# EAGLE board RCSfullschematic2 (EAGLE 7.5.0)

Size 43.17 x 80 mm. Coordinates in mm from the lower left corner, seen from the top.
Outline: 0,0 43.17,0 43.17,80 0,80 0,0
Copper layers (1*16): Top 0.0356mm / dielectric 1.5011mm / Bottom 0.0356mm
Design rules "LaenPCBOrder": minimum track width 6mil, minimum drill 13mil, track to track 6mil, track to pad 6mil, pad to pad 6mil, via to via 6mil, smd to smd 6mil, copper to edge 15mil, drill to drill 6mil, minimum pad ring 7mil, minimum via ring 7mil, stop-mask expansion 3mil, vias tented up to drill 0mil, thermal gap 10mil
Net classes: 1 Motor: width 0.699 mm
Holes 3.26 mm at 3.17,77.47 38.42,77.15 38.1,2.54 3.17,2.54

## Footprints (pad centres in the part's own frame; a part is rotated, then mirrored left to right if it is on the bottom)
1206 = smd 1.6 x 1.8: 1 -1.4,0; 2 1.4,0
C1206 = smd 1.6 x 1.8: 1 -1.4,0; 2 1.4,0
EIA3216 = smd 1.4 x 1.6: + 1.4,0; - -1.4,0
SOD-323@2 = smd 0.63 x 0.83: A 1.15,0; C -1.15,0
SOD-323 = smd 0.63 x 0.83: A 1.15,0; C -1.15,0
CHIPLED_1206 = smd 1.5 x 1.5: A 0,-1.75; C 0,1.75
PTC-1206 = smd 1 x 1.8: 1 -1.4,0; 2 1.4,0
SSOP28 = smd 0.4 x 1.5: 1 -4.225,-3.625; 2 -3.575,-3.625; 3 -2.925,-3.625; 4 -2.275,-3.625; 5 -1.625,-3.625; 6 -0.975,-3.625; 7 -0.325,-3.625; 8 0.325,-3.625; 9 0.975,-3.625; 10 1.625,-3.625; 11 2.275,-3.625; 12 2.925,-3.625; 13 3.575,-3.625; 14 4.225,-3.625; 15 4.225,3.625; 16 3.575,3.625; 17 2.925,3.625; 18 2.275,3.625; 19 1.625,3.625; 20 0.975,3.625; 21 0.325,3.625; 22 -0.325,3.625; 23 -0.975,3.625; 24 -1.625,3.625; 25 -2.275,3.625; 26 -2.925,3.625; 27 -3.575,3.625; 28 -4.225,3.625
317TS = drill 1.016 long: 1 -2.54,-2.54; 2 0,-2.54; 3 2.54,-2.54
MA04-1 = drill 1.016 long: 1 -3.81,0; 2 -1.27,0; 3 1.27,0; 4 3.81,0
1X06_LOCK = drill 1.016 pad 1.88: 1 0,0; 2 2.54,-0.254; 3 5.08,0; 4 7.62,-0.254; 5 10.16,0; 6 12.7,-0.254
USB-MICROB = smd 0.35 x 1.4: D+ 0,2.65; D- -0.65,2.65; GND 1.3,2.65; ID 0.65,2.65; VBUS -1.3,2.65 | smd 1.8 x 1.9: MT1 -4,0; MT2 4,0 | smd 1.9 x 1.9: P$1 -1.27,0; P$2 1.27,0
1X02 = drill 1.016 pad 1.88: 1 0,0; 2 2.54,0
SOT223 = smd 1.219 x 2.235: 1 -2.311,-3.099; 2 0,-3.099; 3 2.311,-3.099 | smd 3.6 x 2.2: 4 0,3.099
1X03 = drill 1.016 pad 1.88: 1 0,0; 2 2.54,0; 3 5.08,0
DIL06 = drill 0.813 offset: 1 -2.54,-3.81; 2 0,-3.81; 3 2.54,-3.81; 4 2.54,3.81; 5 0,3.81; 6 -2.54,3.81
HC49/S = drill 0.813: 1 -2.413,0; 2 2.413,0
R1206 = smd 1.6 x 1.803: 1 -1.422,0; 2 1.422,0
M1206 = smd 1.6 x 2: 1 -1.4,0; 2 1.4,0
DIL08 = drill 0.813 long: 1 -3.81,-3.81; 2 -1.27,-3.81; 3 1.27,-3.81; 4 3.81,-3.81; 5 3.81,3.81; 6 1.27,3.81; 7 -1.27,3.81; 8 -3.81,3.81
PUSHBUTTON_SMD_SJ = smd 2 x 2: P$1 3,0; P$2 -3,0
EDG-01 = drill 0.813 long: 1 0,-3.81; 2 0,3.81
SOT23-3 = smd 0.8 x 0.9: 1 -0.95,-1; 2 0.95,-1; 3 0,1.1
LGA-8 = smd 1.2 x 0.5: 1 -1.2,1.875; 2 -1.2,0.625; 3 -1.2,-0.625; 4 -1.2,-1.875; 5 1.2,-1.875; 6 1.2,-0.625; 7 1.2,0.625; 8 1.2,1.875
LEAD-QFN24 = smd 0.6 x 0.2: 1 -1.6,1; 2 -1.6,0.6; 3 -1.6,0.2; 4 -1.6,-0.2; 5 -1.6,-0.6; 6 -1.6,-1; 13 1.6,-1; 14 1.6,-0.6; 15 1.6,-0.2; 16 1.6,0.2; 17 1.6,0.6; 18 1.6,1 | smd 0.2 x 0.6: 7 -1,-1.6; 8 -0.6,-1.6; 9 -0.2,-1.6; 10 0.2,-1.6; 11 0.6,-1.6; 12 1,-1.6; 19 1,1.6; 20 0.6,1.6; 21 0.2,1.6; 22 -0.2,1.6; 23 -0.6,1.6; 24 -1,1.6 | smd 1.7 x 1.54: 25 0,0
TQFP32-08 = smd 1.27 x 0.559: 1 -4.293,2.8; 2 -4.293,2; 3 -4.293,1.2; 4 -4.293,0.4; 5 -4.293,-0.4; 6 -4.293,-1.2; 7 -4.293,-2; 8 -4.293,-2.8; 17 4.293,-2.8; 18 4.293,-2; 19 4.293,-1.2; 20 4.293,-0.4; 21 4.293,0.4; 22 4.293,1.2; 23 4.293,2; 24 4.293,2.8 | smd 0.559 x 1.27: 9 -2.8,-4.293; 10 -2,-4.293; 11 -1.2,-4.293; 12 -0.4,-4.293; 13 0.4,-4.293; 14 1.2,-4.293; 15 2,-4.293; 16 2.8,-4.293; 25 2.8,4.293; 26 2,4.293; 27 1.2,4.293; 28 0.4,4.293; 29 -0.4,4.293; 30 -1.2,4.293; 31 -2,4.293; 32 -2.8,4.293
MSOP10 = smd 0.3 x 1: 1 -1,-2.05; 2 -0.5,-2.05; 3 0,-2.05; 4 0.5,-2.05; 5 1,-2.05; 6 1,2.05; 7 0.5,2.05; 8 0,2.05; 9 -0.5,2.05; 10 -1,2.05

## Placement (x,y rotation side)
C1  .1uF  [1206]  3.49,40.01 180 top
C2  .1uF  [1206]  3.49,36.51 180 top
C3  .1uF  [1206]  15.24,38.73 270 top
C4  0.1uF  [1206]  40.01,32.38 270 top
C5  0.1uF  [1206]  9.53,57.78 0 top
C6  22 pF  [C1206]  16.83,10.48 0 top
C7  22 pF  [C1206]  16.83,15.24 0 top
C8  100 nF  [C1206]  3.49,32.7 180 top
C9  .1 uF  [C1206]  27.3,26.35 180 top
C10  10 uF  [C1206]  3.49,28.89 180 top
C11  0.1 uF  [C1206]  3.49,25.4 180 top
C12  0.1uF  [C1206]  23.5,66.36 0 top
C13  10uF  [EIA3216]  39.05,46.35 270 top
C14  10uF  [EIA3216]  23.5,57.78 0 top
C15  0.1uF  [C1206]  36.51,38.73 90 top
C16  10uF  [EIA3216]  16.51,57.78 0 top
C17  10uF  [EIA3216]  16.51,62.23 0 top
D1  3.3V  [SOD-323@2]  38.73,52.39 0 top
D4  BAT20JFILM  [SOD-323]  31.43,60.33 0 top
ERROR  Red  [CHIPLED_1206]  20.64,20.64 90 top
F1  1.5A  [PTC-1206]  31.75,55.24 180 top
F2  500mA  [PTC-1206]  33.34,26.35 0 top
F3  100mA  [PTC-1206]  16.51,66.36 180 top
F4  1.5A  [PTC-1206]  9.53,61.91 0 top
IC2  FT232RL  [SSOP28]  12.06,25.4 270 top
IC3  [317TS]  18.41,79.69 0 top
J1  [MA04-1]  28.89,2.22 0 top
J6  [1X06_LOCK]  7.3,2.22 0 top
J7  USB-MICROB  [USB-MICROB]  2.54,18.41 270 top
JP1  SENSOR/MCU  [1X02]  3.17,55.56 270 top
JP5  MOTOR  [1X02]  3.17,61.59 270 top
LM117  [SOT223]  32.07,47.31 0 top
MCU  [1X03]  2.22,6.03 90 top
MPWR1  11.1  [1X02]  10.79,77.47 180 top
MPWR2  7.4V  [1X02]  38.73,70.17 90 top
OK1  4N35  [DIL06]  31.43,68.26 0 top
POT  [1X03]  3.17,43.81 90 top
Q2  8 MHz  [HC49/S]  10.48,13.34 90 top
R1  220  [1206]  38.73,23.81 90 top
R2  10k  [1206]  16.51,70.8 180 top
R3  10k  [1206]  40.01,38.73 90 top
R4  1.2k  [1206]  33.34,38.73 270 top
R5  10k  [R1206]  26.35,38.73 270 top
R6  10k  [R1206]  33.02,32.38 90 top
R7  10k  [R1206]  36.51,32.38 90 top
R8  100  [R1206]  22.86,38.73 90 top
R9  100  [R1206]  29.53,32.38 90 top
R10  100  [R1206]  33.66,20.64 180 top
R11  10k  [R1206]  29.84,38.73 270 top
R12  180  [M1206]  23.5,61.91 180 top
R13  110  [M1206]  23.5,70.8 180 top
R14  200  [M1206]  9.53,70.8 0 top
R15  750  [M1206]  9.53,66.36 180 top
R16  100  [R1206]  20.64,26.35 0 top
RX  Yellow  [CHIPLED_1206]  25.72,32.38 0 top
SERVO  SMALL_SERVO  [1X03]  38.1,61.28 270 top
STATE  AT24CP  [DIL08]  10.79,48.26 270 top
STATUS  Green  [CHIPLED_1206]  27.3,20.64 270 top
STORAGE  AT24CP  [DIL08]  22.23,48.26 270 top
SW1  [PUSHBUTTON_SMD_SJ]  36.51,8.89 180 top
SW2  [EDG-01]  30.48,77.47 270 top
SW3  [EDG-01]  3.17,69.22 0 top
T1  MMBT2222A  [SOT23-3]  38.73,65.72 270 top
TX  Yellow  [CHIPLED_1206]  19.05,38.73 0 top
U1  MPL3115A2  [LGA-8]  10.16,37.47 0 top
U2  MPU-9250  [LEAD-QFN24]  20.32,32.38 270 top
U3  ATMEGA328P_TQFP  [TQFP32-08]  25.72,12.06 0 top
U4  ADS1015  [MSOP10]  36.51,16.19 270 top

## Library data of the parts
C1-C3 = SparkFun-Capacitors; PROD_ID: CAP-10057
C4 C5 R1-R4 = SparkFun-Passives
C6-C11 = eagle-ltspice; SPICEMODEL: NONE; SPICEPREFIX: C
C12 C15 R12-R15 = rcl
C13 C14 C16 C17 = SparkFun-Capacitors; PROD_ID: CAP-00811
D1 = SparkFun-DiscreteSemi; PROD_ID: DIO-08199
D4 = SparkFun-DiscreteSemi; PROD_ID: DIO-11623
ERROR R5-R11 R16 RX STATUS SW1 TX = adafruit
F1-F4 = SparkFun-PowerIC; PROD_ID: RES-11150
IC2 = ftdichip; MPN: FT232RL; OC_FARNELL: 1146032; OC_NEWARK: 91K9918
IC3 = v-reg
J1 = con-lstb; OC_FARNELL: unknown; OC_NEWARK: unknown
J6 JP1 JP5 MCU MPWR1 MPWR2 POT = SparkFun-Connectors
J7 = SparkFun-Connectors; PROD_ID: CONN-09505
LM117 = SparkFun-IC-Power; PROD_ID: VREG-08170
OK1 = optocoupler; MF: FAIRCHILD SEMICONDUCTOR; MPN: 4N35; OC_FARNELL: 1328375; OC_NEWARK: 72K9946
Q2 = adafruit; OC_FARNELL: 1667008; OC_NEWARK: unknown
SERVO = SparkFun-Electromechanical
STATE STORAGE = atmel; MPN: AT24C1024BW-SH-B; OC_FARNELL: 1362646; OC_NEWARK: 03P2044
SW2 SW3 = special
T1 = SparkFun-DiscreteSemi; PROD_ID: TRANS-08049
U1 = SparkFun-Sensors; PROD_ID: IC-10869
U2 = invensense copy
U3 = SparkFun-DigitalIC; PROD_ID: IC-09069
U4 = SparkFun-AnalogIC; PROD_ID: IC-12239

## Nets
6V_POWER [Motor]: C4.1 C5.1 D4.C F1.1 R2.2 R3.1 SERVO.2
A4(SDA): J1.2 R7.1 STATE.5 STORAGE.5 U1.7 U2.24 U3.27 U4.9
A5(SCL): J1.1 R6.1 STATE.6 STORAGE.6 U1.8 U2.23 U3.28 U4.10
CS: U2.22
DM: IC2.16 J7.D-
DP: IC2.15 J7.D+
DTR: C9.2 IC2.2
FEEDBACK: MCU.1 POT.2 U3.26 U4.4
GND: C1.2 C2.2 C3.2 C6.1 C7.1 C8.1 C10.2 C11.2 C12.2 C13.- C14.- D1.A IC2.7 IC2.18 IC2.21 IC2.25 IC2.26 J1.4 J6.1 J7.GND J7.MT1 J7.MT2 JP1.2 MCU.3 MPWR2.1 OK1.2 R4.2 R8.1 R9.1 R10.1 R11.2 R12.1 R16.1 STATE.1 STATE.2 STATE.4 STORAGE.1 STORAGE.2 STORAGE.3 STORAGE.4 STORAGE.7 SW1.P$2 U1.3 U2.9 U2.11 U2.18 U2.20 U3.3 U3.5 U3.21 U4.3
GND1 [Motor]: C4.2 C5.2 C15.2 C16.- C17.- D4.A JP5.2 MPWR1.1 OK1.4 R15.1 SERVO.3 T1.2
INT: U2.12 U3.32
INT1: U1.6
INT2: U1.5
LOGIC_VDD: C3.1 C14.+ D1.C F2.2 J1.3 JP1.1 LM117.2 POT.1 R6.2 R7.2 R13.2 U1.1 U1.4 U2.1 U2.8 U2.13 U2.19
MISO: J6.5 U3.16
MOSI: J6.4 U3.15
MOTOR: MCU.2 R1.1 U3.13
N$1: C1.1 U1.2
N$2 [Motor]: OK1.5 R2.1 T1.1
N$3: C2.1 U2.10
N$5: POT.3 R4.1
N$6: R11.1 U4.1
N$7: OK1.1 R1.2
N$8: C7.2 Q2.2 U3.7
N$9: C6.2 Q2.1 U3.8
N$10: R8.2 TX.C
N$11: R9.2 RX.C
N$12: STATUS.A U3.1
N$13: R10.2 STATUS.C
N$14: ERROR.C R16.2
N$15: LM117.1 R12.2 R13.1
N$16: MPWR2.2 SW2.2
N$17: C12.1 C13.+ F3.2 LM117.3
N$18: F3.1 SW2.1
N$19 [Motor]: MPWR1.2 SW3.2
N$20 [Motor]: F4.1 SW3.1
N$21 [Motor]: C15.1 C16.+ F4.2 IC3.3
N$22 [Motor]: IC3.1 R14.1 R15.2
N$23: ERROR.A U3.2
RESET: C9.1 J6.3 R5.1 SW1.P$1 U3.29
RX: IC2.1 RX.A U3.30
SCK: J6.6 U3.17
SIGNAL [Motor]: R3.2 SERVO.1 T1.3
TX: IC2.5 TX.A U3.31
USBVDD: C10.1 C11.1 IC2.20 J7.VBUS
VCC: F2.1 R5.2 STATE.3 STATE.7 STATE.8 STORAGE.8 U3.4 U3.6 U3.18 U3.20 U4.8
VDD: J6.2
VDD_IO: C8.2 IC2.4 IC2.17
VOUT-MOTOR [Motor]: C17.+ F1.2 IC3.2 JP5.1 R14.2

## Tracks (layer width: path | path; a pad name or v marks a point on that pad's centre or on a via)
6V_POWER  (6 unrouted)
A4(SDA)  (7 unrouted)
A5(SCL)  (7 unrouted)
DM  (1 unrouted)
DP  (1 unrouted)
DTR  (1 unrouted)
FEEDBACK  (3 unrouted)
GND  (50 unrouted)
GND1  (11 unrouted)
INT  (1 unrouted)
LOGIC_VDD  (16 unrouted)
MISO  (1 unrouted)
MOSI  (1 unrouted)
MOTOR  (2 unrouted)
N$1  (1 unrouted)
N$2  (2 unrouted)
N$3  (1 unrouted)
N$5  (1 unrouted)
N$6  (1 unrouted)
N$7  (1 unrouted)
N$8  (2 unrouted)
N$9  (2 unrouted)
N$10  (1 unrouted)
N$11  (1 unrouted)
N$12  (1 unrouted)
N$13  (1 unrouted)
N$14  (1 unrouted)
N$15  (2 unrouted)
N$16  (1 unrouted)
N$17  (3 unrouted)
N$18  (1 unrouted)
N$19  (1 unrouted)
N$20  (1 unrouted)
N$21  (3 unrouted)
N$22  (2 unrouted)
N$23  (1 unrouted)
RESET  (4 unrouted)
RX  (2 unrouted)
SCK  (1 unrouted)
SIGNAL  (2 unrouted)
TX  (2 unrouted)
USBVDD  (3 unrouted)
VCC  (10 unrouted)
VDD_IO  (2 unrouted)
VOUT-MOTOR  (4 unrouted)

## Text on the board
tNames: + | - | + | - | - | + | - | + | S | - | + | - | + | V | G | - | FEED | + | - | SIG | FEED | - | + | RESET | MOSI | MISO | SCK | SCL | SDA | + | -